# Altium PCB led.PcbDoc
Units mm, origin at the board's own origin, x right, y up, seen from the top; angles counter-clockwise.
Board outline 17.5 x 15 mm, 2 copper layers (Top Layer, Bottom Layer), stack 1.671 mm thick; 3 components, 3 nets, 6 pads, 1 vias.
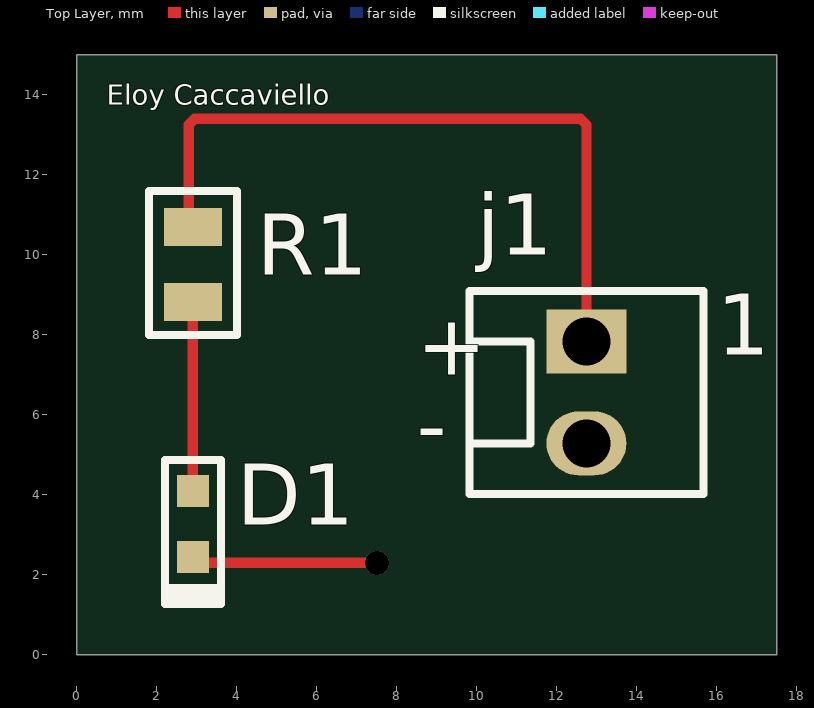
[diagram p0: Top Layer view]
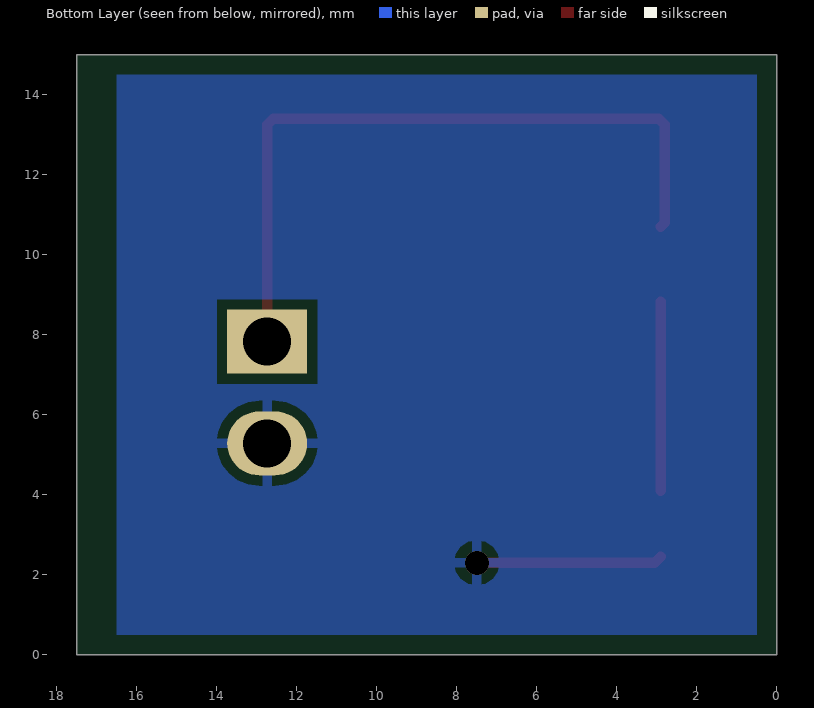
[diagram p1: Bottom Layer view, seen from below]
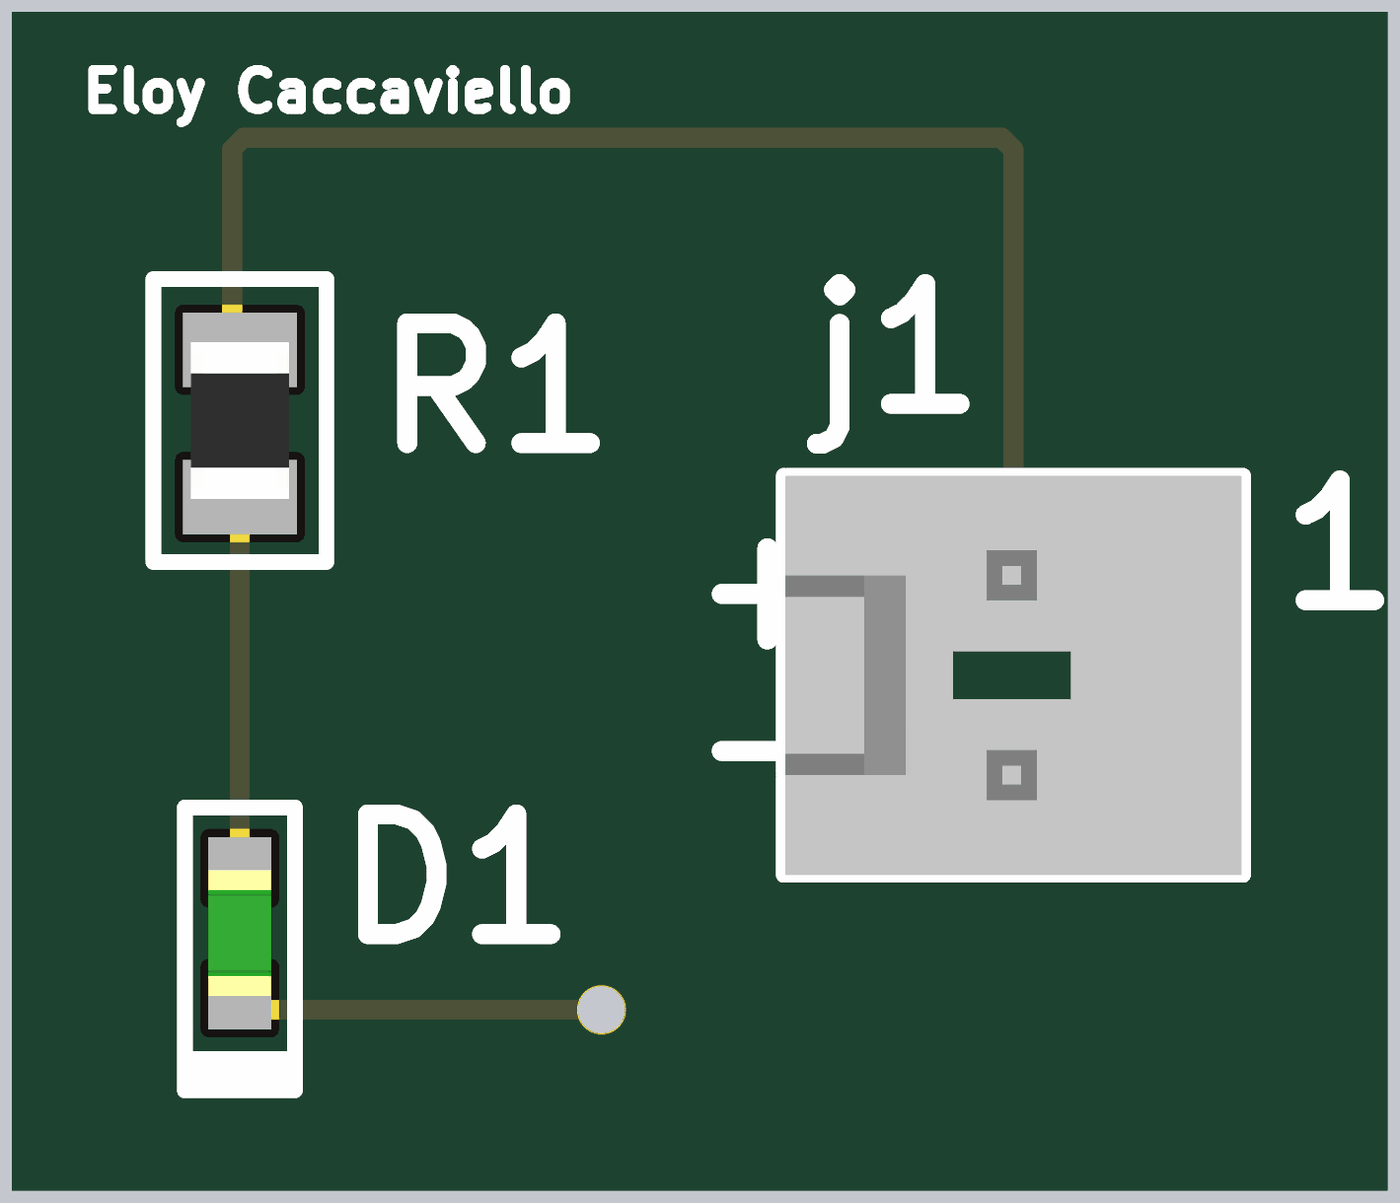
[diagram p2: 3D render of the assembled board from above, using the file's embedded part models]

## Layer stack, top to bottom
Top Solder: solder mask 0.0102, Solder Resist, Dk 3.5
Top Layer: signal copper 0.0356
Dielectric 1: dielectric 1.6, FR-4, Dk 4.8
Bottom Layer: signal copper 0.0356
Bottom Solder: solder mask 0.0102, Solder Resist, Dk 3.5

## Board outline
0,15 17.5,15 17.5,0 0,0

## Design rules (kind name [scope] priority, off if disabled: settings)
Clearance [All] p1: gap=0.3 ignorepadtopadclearanceinfootprint=FALSE
MinimumSolderMaskSliver [All] p1: minsoldermaskwidth=0.1
PolygonConnect [All] p1: connectstyle=Relief reliefconductorwidth=0.254 reliefentries=4 polygonreliefangle="90 Angle" airgapwidth=0.254
RoutingVias [All] p1: holewidth=0.3 width=0.6 viastyle="Through Hole" minholewidth=0.3 minwidth=0.6 maxholewidth=0.3 maxwidth=0.6
SolderMaskExpansion [All] p1: expansion=0.102
Width [All] p1: maxlimit=1 minlimit=0.3 preferedwidth=0.5
29 further rules are at their usual default settings.

## Components (designator, comment, footprint, x,y, rotation, side; value= is the part's Value field where it differs from the comment)
D1 "GREEN" GREEN 2.9,3.275 r90 top
j1 "1x2 Header" HDR1x2 12.74,7.827 r0 top
R1 "360R" R0805 2.9,9.8 r270 top

## Footprints (in the part's own frame and the unit in brackets; to place one, negate y for a bottom-side part, rotate by r counter-clockwise, add the part's x,y. Pads: shape width x height; smd on the part's side, far side on the other; paste and mask are expansions set on the pad)
GREEN [mm]
  rect 0.8x0.8 smd: 1(-0.825,0) 2(0.825,0)
  silkscreen extent -2,-0.7 1.6,0.7, body extent -0.8,-0.4 0.8,0.4, height 0.4
HDR1x2 [mm]
  rect 2x1.6 hole 1.2: 1(0,0)
  oval 2x1.6 hole 1.2: 2(0,-2.54)
  silkscreen extent -2.92,-3.81 2.92,1.27, body extent -2.9,-3.81 2.9,1.27, height 11.07
R0805 [mm]
  rect 0.95x1.45 smd: 1(-0.9,0) 2(0.975,0)
  silkscreen extent -1.8,-1.1 1.8,1.1, body extent -1,-0.62 1,0.62, height 0.61

## Part data
D1: library part LNJ337W83RA, "LED GREEN ESS II SMD", Case/Package=0603, Case Code (Metric)=1608, Color=Green,Yellow, Forward Current=20mA, Forward Voltage=1.95V, Illumination Color=Green, Manufacturer 1="Panasonic SSG", Max Operating Temperature=85°C, Max Power Dissipation=55mW, Min Operating Temperature=-30°C, Package Quantity=5000, Reverse Voltage=4V, Supplier Part Number 1=1908053, Test Current=5mA, Case Code (Imperial)=0603, Category=Optoelectronics, ComponentLink1Description=https://datasheet.ciiva.com/6868/lnj337w83ra-aek-6868817.pdf?src-supplier=Newark, ComponentLink1URL=https://datasheet.ciiva.com/6868/lnj337w83ra-aek-6868817.pdf?src-supplier=Newark, ComponentLink2Description=https://datasheet.ciiva.com/11775/0900766b80f0a8bb-11775418.pdf?src-supplier=RSComponents, ComponentLink2URL=https://datasheet.ciiva.com/11775/0900766b80f0a8bb-11775418.pdf?src-supplier=RSComponents, ComponentLink3Description=https://datasheet.ciiva.com/4690/lnj337w83ra-aek-226051-4690026.pdf?src-supplier=Mouser, ComponentLink3URL=https://datasheet.ciiva.com/4690/lnj337w83ra-aek-226051-4690026.pdf?src-supplier=Mouser, Dominant Wavelength=572nm, Height=0.2mm, Lead Free="Lead Free", Length=1.6mm, Lens Style=Rectangular, Luminous Intensity=7.5mcd, Manufacturer Part Number 1=LNJ337W83RA, Mount="Surface Mount", Number of LEDs=1, Number of Pins=2, Packaging="Cut Tape", Power Rating=55mW, Pricing 1="5=0,17800, 25=0,15100, 100=0,11700, 250=0,10100, 500=0,09170, 1000=0,08240 (GBP)", REACH SVHC=Yes, Reverse Voltage (DC)=4V, RoHS=Yes, RoHS Compliant=Yes, Series=LN, Stock 1=0, Supplier 1=Farnell, Wavelength=572nm, Width=0.8mm
j1: library part 22-29-2021, "CONN HEADER VERT 2POS 2.54MM", Color=White, Flammability Rating="UL94 V-0", Housing Color=Natural, Manufacturer 1=Molex, Max Operating Temperature=80°C, Package Quantity=24000, Supplier Part Number 1=WM2744-ND, Voltage Rating (DC)=250V, Category=Connectors, ComponentLink1Description=https://datasheet.ciiva.com/70131/022292021-sd-70131706.pdf?src-supplier=Digi-Key, ComponentLink1URL=https://datasheet.ciiva.com/70131/022292021-sd-70131706.pdf?src-supplier=Digi-Key, Connector Type="Header,Male Pin", Contact Material=Tin, Contact Mating Length=0.295inch, Contact Plating=Gold, Contact Post Length=0.14inch, Contact Shape=Square, Contact Type=-, Fastening Type=Friction, Gender=Male, Glow Wire Compliant=Non-compliant, Halogen Free="Low Halogen", Insulation Color=Natural, Insulation Height=0.461inch, Insulation Material=Nylon, Lead Free="Lead Free", Manufacturer Part Number 1=22-29-2021, Mount="Through Hole", Number of Positions=2, Number of Rows=1, Packaging=Bulk, Pricing 1="1=0,48000, 10=0,40400, 100=0,31400, 1000=0,24671, 5000=0,21680, 10000=0,20185 (USD)", RoHS=Yes, Series=6410, Stock 1=9231, Supplier 1=Digi-Key, Termination="Through Hole"
R1: library part CRCW0805360KFKEAHP, "RES SMD 360K OHM 1% 1/2W 0805", Case/Package=0805, Case Code (Metric)=2012, Manufacturer 1="Vishay Dale", Max Operating Temperature=155°C, Max Power Dissipation=500mW, Min Operating Temperature=-55°C, Package Quantity=5000, Power Rating=330mW, Resistance=360kR, Resistor Type="Thick Film", Supplier Part Number 1=541-360KTCT-ND, Temperature Coefficient=100ppm/°C, Tolerance=1%, Case Code (Imperial)=0805, Category=Resistors, ComponentLink1Description=https://datasheet.ciiva.com/2581/crcwhpe3-2581793.pdf?src-supplier=Digi-Key, ComponentLink1URL=https://datasheet.ciiva.com/2581/crcwhpe3-2581793.pdf?src-supplier=Digi-Key, Contact Plating=Tin, Features="Automotive AEC-Q200", Height=0.024inch, Lead Free="Lead Free", Length=0.079inch, Manufacturer Part Number 1=CRCW0805360KFKEAHP, Mount="Surface Mount", Number of Terminations=2, Packaging="Tape and Reel", Pricing 1="1=0,26000, 10=0,22200, 100=0,08690, 1000=0,03637, 2500=0,03334 (USD)", RoHS=Yes, RoHS Compliant=Yes, Series=CRCW-HP, Stock 1=4545, Supplier 1=Digi-Key, Termination=Wraparound, Width=0.049inch

## Via types
v1: diameter 0.6, hole 0.6, Top Layer to Bottom Layer, tented top, 1 vias

## Nets (pads, with @x,y where several pads share a name; then routed paths per layer and width w, separated by ;. In a path a pad name is that pad's centre, name@x,y a point inside that pad or via, vN(x,y) a via of type N, cw(c..) or ccw(c..) an arc to the next point about the centre after c; other vN are vias at no path point)
+3V3: j1.1 R1.1 | length 18.1
  Top Layer w0.254: R1.1 2.8,10.8 2.8,13.251 2.949,13.4 12.591,13.4 12.74,13.251 j1.1
DIODE: D1.2 R1.2 | length 4.7
  Top Layer w0.254: D1.2 R1.2
GND: D1.1 j1.2 | length 4.7
  Top Layer w0.254: D1.1 3.05,2.3 v1(7.5,2.3)

## Polygon pours and split planes (outlines as drawn)
GND on Bottom Layer (solid, pour order 4): 16.5,14.5 0.5,14.5 0.5,0.5 16.5,0.5
GND on Bottom Layer (solid, pour order 6): 18.5,8.5
GND on Bottom Layer (solid, pour order 2): 18.5,11

## Silkscreen, mask and mechanical layers (free items; w line width, h text height)
Top Overlay:
  text "Eloy Caccaviello" at 0.75,13.75 h0.5
  text "+" at 8.5,7 h1.52
  text "-" at 8.5,5 h1.52
Board Outline:
  the board outline again, w0.2

## Text inside footprints (layer, text, board x,y; h text height)
j1: Top Overlay "1" at 16,7.5 h1.52